# EAGLE board MidiMon_B (EAGLE 9.3.0)
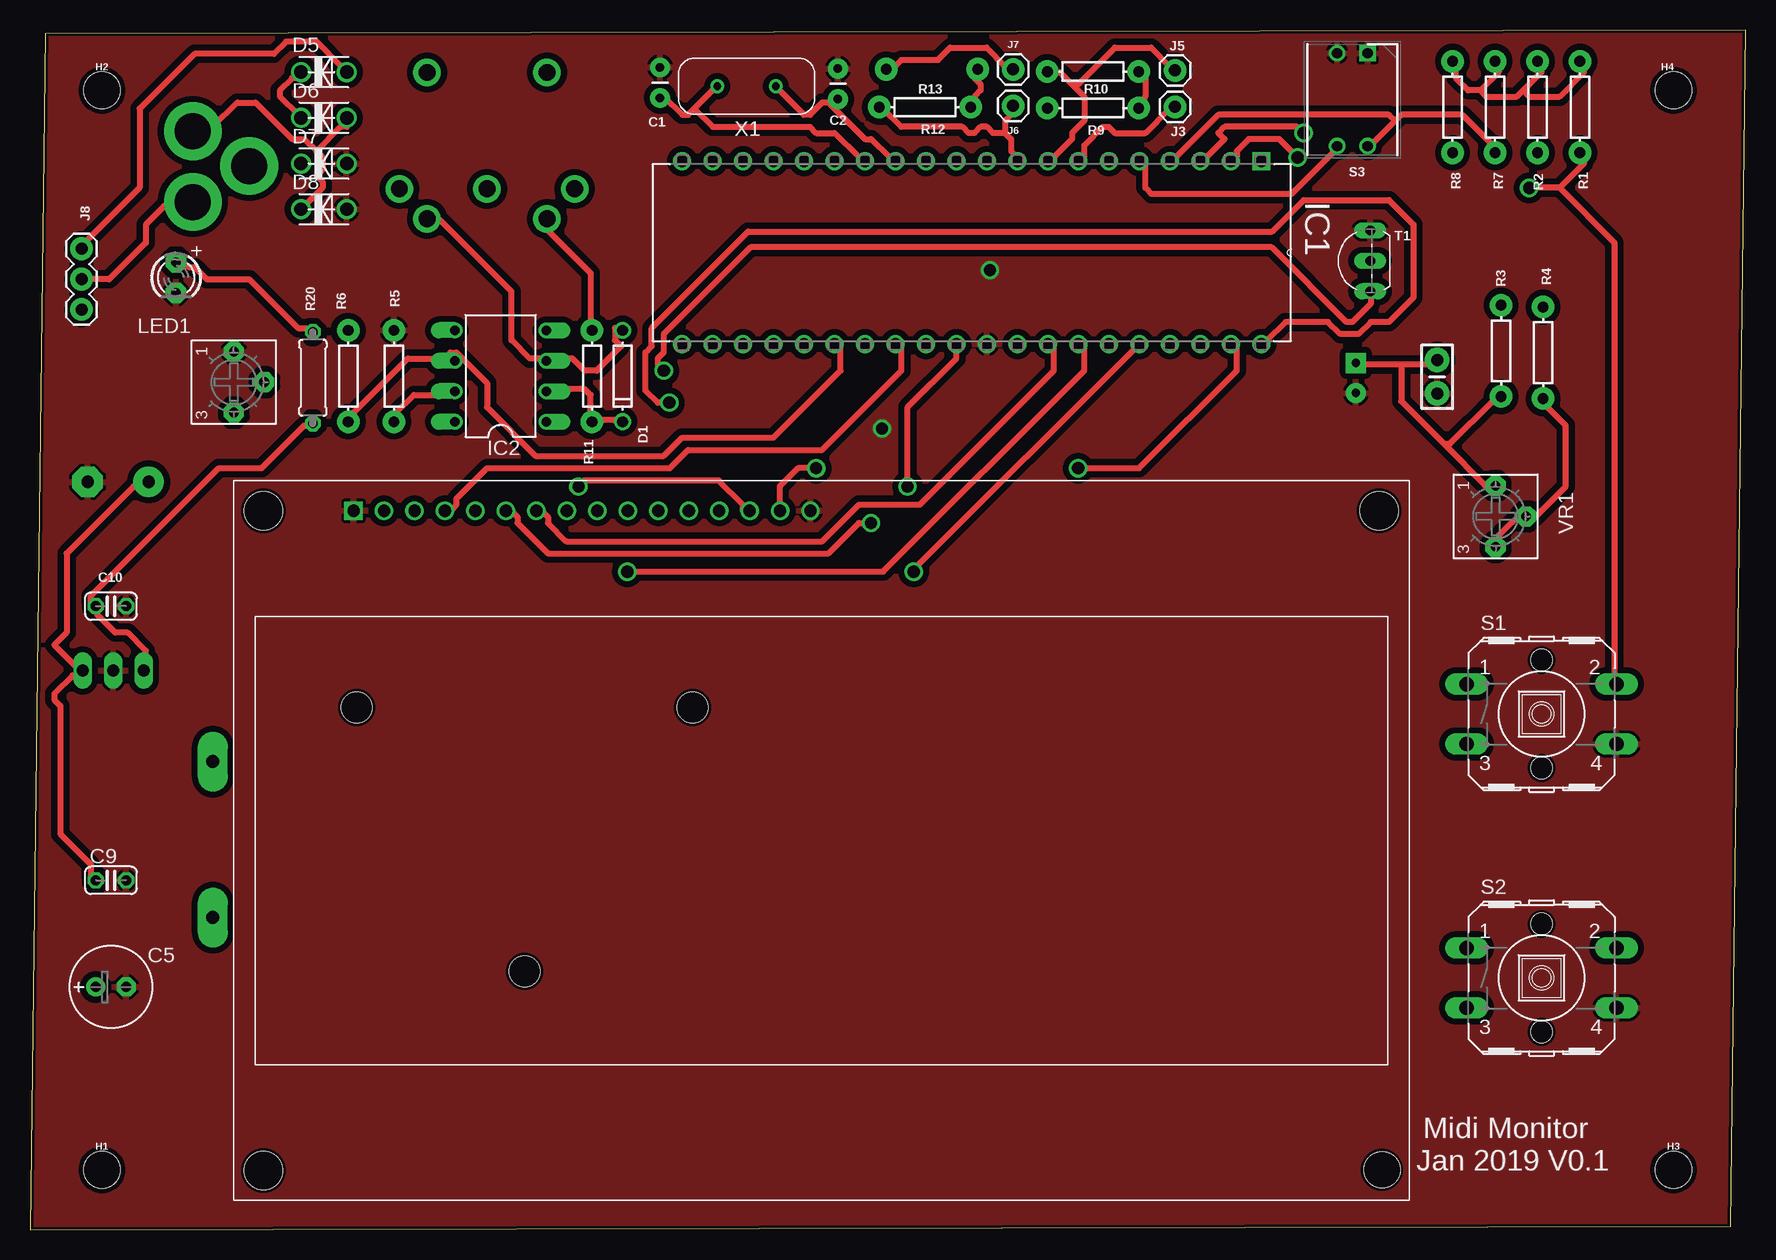
[diagram p0: board, top side]
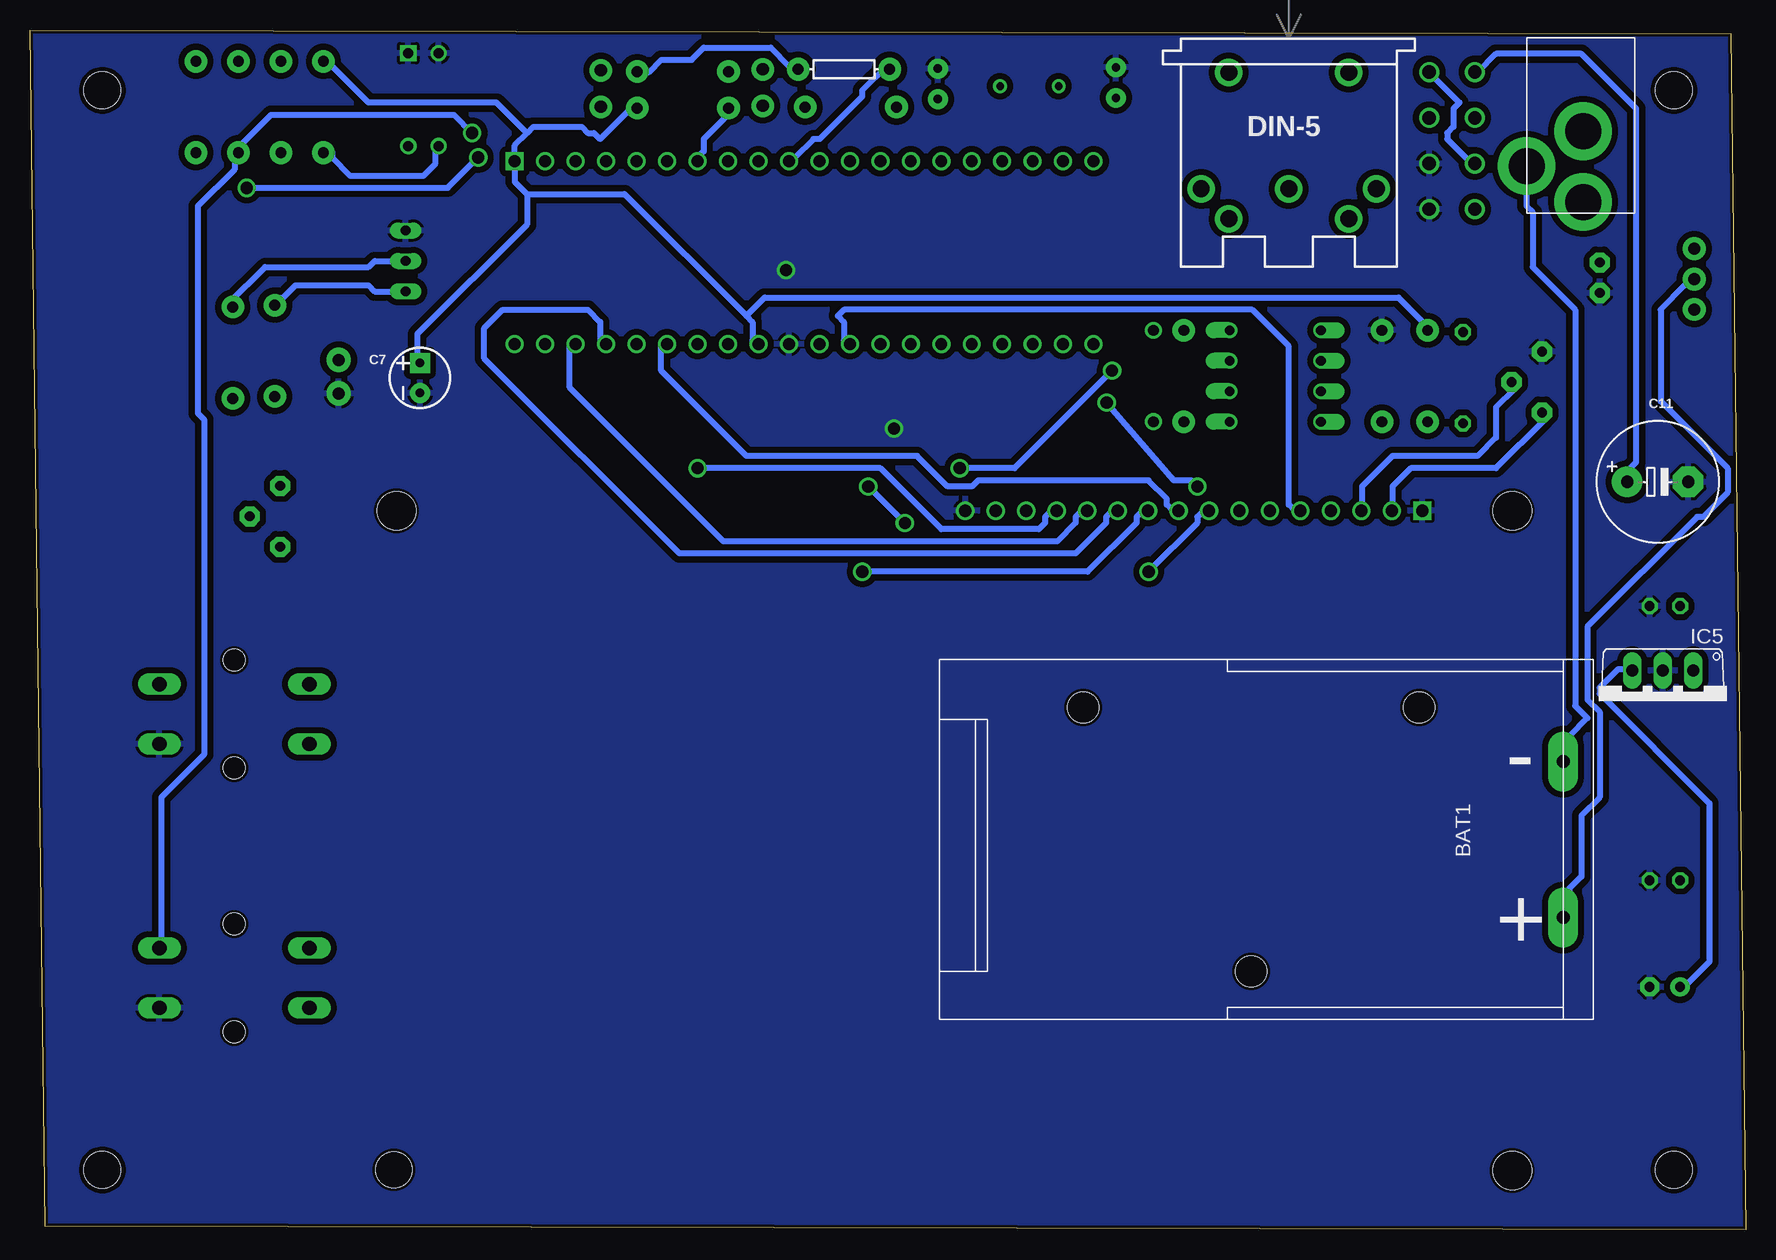
[diagram p1: board, bottom side, seen from below]

Size 143.03 x 100.03 mm. Coordinates in mm from the lower left corner, seen from the top.
Outline: 0,0 141.76,0.3 143.03,100.03 1.27,99.73 0,0
Copper layers (1*16): Top 0.035mm / dielectric 1.5mm / Bottom 0.035mm
Design rules "dirt_cheap_dirty_boards.v1.1": minimum track width 6mil, minimum drill 12mil, track to track 6mil, track to pad 6mil, pad to pad 6mil, via to via 6mil, smd to smd 0mil, copper to edge 10mil, drill to drill 10mil, minimum pad ring 10mil, minimum via ring 6mil, stop-mask expansion 2mil, vias tented up to drill 25mil, thermal gap 10mil
Net classes: 0 default: width 0.508 mm, drill 0.508 mm, clearance 0.508 mm
Holes 3 mm at 112.7,5

## Footprints (pad centres in the part's own frame; a part is rotated, then mirrored left to right if it is on the bottom)
PP3_BATTERBOX = drill 1.1 pad 2.5 long: 0V 52,21.5; 9V 52,8.5 | hole 2.6: 12,26; 40,26; 26,4
CAP-PTH-2.54 = drill 0.7 pad 1.651: 1 -1.27,0; 2 1.27,0
E2,5-7 = drill 0.813 pad 1.6: + -1.27,0 | drill 0.813 pad 1.6 octagon: - 1.27,0
CPOL-RADIAL-2.5MM-5MM = drill 0.7 pad 1.651 square: 1 1.25,0 | drill 0.7 pad 1.651: 2 -1.25,0
CAP-PTH-SMALL-KIT = drill 1.016 pad 2.032: 1 -1.397,0; 2 1.397,0
C025-024X044 = drill 0.813 octagon: 1 -1.27,0; 2 1.27,0
E5-10,5 = drill 1.016 pad 2.54: + -2.54,0 | drill 1.016 pad 2.54 octagon: - 2.54,0
DO-1N4148 = drill 0.9: A -3.81,0; C 3.81,0
DO-VERT = drill 1.118: A 2.54,0; C -1.27,0
STAND-OFF-TIGHT = hole 3.048: 0,0
DIP254P1524X533-40 = drill 0.991 square: 1 -15.24,48.26 | drill 0.991: 2 -15.24,45.72; 3 -15.24,43.18; 4 -15.24,40.64; 5 -15.24,38.1; 6 -15.24,35.56; 7 -15.24,33.02; 8 -15.24,30.48; 9 -15.24,27.94; 10 -15.24,25.4; 11 -15.24,22.86; 12 -15.24,20.32; 13 -15.24,17.78; 14 -15.24,15.24; 15 -15.24,12.7; 16 -15.24,10.16; 17 -15.24,7.62; 18 -15.24,5.08; 19 -15.24,2.54; 20 -15.24,0; 21 0,0; 22 0,2.54; 23 0,5.08; 24 0,7.62; 25 0,10.16; 26 0,12.7; 27 0,15.24; 28 0,17.78; 29 0,20.32; 30 0,22.86; 31 0,25.4; 32 0,27.94; 33 0,30.48; 34 0,33.02; 35 0,35.56; 36 0,38.1; 37 0,40.64; 38 0,43.18; 39 0,45.72; 40 0,48.26
DIL08 = drill 0.813 offset: 1 -3.81,-3.81; 2 -1.27,-3.81; 3 1.27,-3.81; 4 3.81,-3.81; 5 3.81,3.81; 6 1.27,3.81; 7 -1.27,3.81; 8 -3.81,3.81
TO220V = drill 1.016 long: 1 -2.54,-2.54; 2 0,-2.54; 3 2.54,-2.54
DIN5-RA-PTH = drill 1.4 pad 2.286: 1 7.3,12.5; 2 0,12.5; 3 -7.3,12.5; 4 5,15; 5 -5,15; 6 -5,2.8; 7 5,2.8
1X01 = drill 1.016 pad 1.88: 1 0,0
PJ-102A = drill 3 pad 4.8: RING 0.1,-3.39; RING_SW -4.6,-6.29; TIP 0.1,-9.29
1X03 = drill 1.016 pad 1.88: 1 0,0; 2 2.54,0; 3 5.08,0
LED3MM = drill 0.813 pad 1.676 octagon: A -1.27,0; K 1.27,0
AXIAL-0.3 = drill 0.9 pad 1.88: P$1 -3.81,0; P$2 3.81,0
0207/7 = drill 0.813 octagon: 1 -3.81,0; 2 3.81,0
B3F-40XX = drill 1.194 long: 1 -6.248,2.489; 2 6.248,2.489; 3 -6.248,-2.489; 4 6.248,-2.489 | hole 1.803: 0,-4.496; 0,4.496
DIPS774W56P254L726H790Q4N = drill 0.85 pad 1.275 square: 1 0,0 | drill 0.85 pad 1.275: 2 0,-2.54; 3 7.745,-2.54; 4 7.745,0
TO92-CBE = drill 0.813 long: B 0,0; C -2.54,0; E 2.54,0
LCD-20X4-3HOLES = drill 1.016 square: P$1 10,57.5 | drill 1.016: P$2 12.54,57.5; P$3 15.08,57.5; P$4 17.62,57.5; P$5 20.16,57.5; P$6 22.7,57.5; P$7 25.24,57.5; P$8 27.78,57.5; P$9 30.32,57.5; P$10 32.86,57.5; P$11 35.4,57.5; P$12 37.94,57.5; P$13 40.48,57.5; P$14 43.02,57.5; P$15 45.56,57.5; P$16 48.1,57.5 | hole 3.2: 2.5,2.5; 2.5,57.5; 95.5,57.5
BOURNS_3362P_TRIMMER = drill 0.813 pad 1.676 octagon: 1 -2.54,0; 2 0,2.54; 3 2.54,0
XTAL_ECS-100-18-4X = drill 0.63 pad 1.03: 1 -2.44,0; 2 2.44,0

## Placement (x,y rotation side)
BAT1  [PP3_BATTERBOX]  67.23,17.55 0 bottom
C1  18pF  [CAP-PTH-2.54]  52.51,95.64 270 top
C2  18pF  [CAP-PTH-2.54]  67.35,95.54 270 top
C5  10uf  [E2,5-7]  6.75,20.25 0 top
C7  10uF  [CPOL-RADIAL-2.5MM-5MM]  110.52,71.02 90 bottom
C8  0.1uF  [CAP-PTH-SMALL-KIT]  117.3,71.12 90 top
C9  330nf  [C025-024X044]  6.75,29.14 0 top
C10  100nf  [C025-024X044]  6.75,52 0 top
C11  2200uf  [E5-10,5]  7.35,62.36 0 bottom
D1  [DO-1N4148]  49.39,71.18 270 top
D5  1N4004  [DO-VERT]  23.86,96.52 0 top
D6  1N4004  [DO-VERT]  23.86,92.71 0 top
D7  1N4004  [DO-VERT]  23.86,88.9 0 top
D8  1N4004  [DO-VERT]  23.86,85.09 0 top
H1  STAND-OFFTIGHT  [STAND-OFF-TIGHT]  6,5 0 top
H2  STAND-OFFTIGHT  [STAND-OFF-TIGHT]  6,95 0 top
H3  STAND-OFFTIGHT  [STAND-OFF-TIGHT]  137,5 0 top
H4  STAND-OFFTIGHT  [STAND-OFF-TIGHT]  137,95 0 top
IC1  PIC18F4520-I/P  [DIP254P1524X533-40]  54.37,73.85 270 top
IC2  6N138  [DIL08]  39.23,71.18 90 top
IC5  7805TV  [TO220V]  6.93,44.09 180 bottom
J1  DIN5  [DIN5-RA-PTH]  38.1,99.29 180 bottom
J3  [1X01]  95.45,93.63 0 top
J4  2.1MMJACKTHM  [PJ-102A]  13.67,94.98 0 bottom
J5  [1X01]  95.45,96.67 0 top
J6  [1X01]  81.95,93.71 0 top
J7  [1X01]  81.95,96.75 0 top
J8  [1X03]  4.3,81.8 270 top
LED1  [LED3MM]  12.17,79.38 270 top
R1  10k  [AXIAL-0.3]  129.2,93.61 270 top
R2  10k  [AXIAL-0.3]  125.66,93.61 270 top
R3  10k  [AXIAL-0.3]  122.63,73.28 270 top
R4  10k  [AXIAL-0.3]  126.13,73.12 270 top
R5  5.6k  [AXIAL-0.3]  30.34,71.18 270 top
R6  1.2k  [AXIAL-0.3]  26.53,71.18 90 top
R7  10k  [AXIAL-0.3]  122.12,93.61 270 top
R8  10k  [AXIAL-0.3]  118.58,93.61 270 top
R9  10k  [AXIAL-0.3]  88.61,93.52 180 top
R10  10k  [AXIAL-0.3]  88.61,96.56 0 top
R11  220  [AXIAL-0.3]  46.85,71.18 90 top
R12  10k  [AXIAL-0.3]  74.61,93.6 0 top
R13  10k  [AXIAL-0.3]  75.19,96.76 180 bottom
R20  1k  [0207/7]  23.58,71.04 90 top
S1  [B3F-40XX]  126,43 0 top
S2  [B3F-40XX]  126,21 0 top
S3  195-2MST  [DIPS774W56P254L726H790Q4N]  111.5,98.1 270 top
T1  [TO92-CBE]  111.72,80.78 90 top
U$2  LCD-HD4478020X4-3HOLES  [LCD-20X4-3HOLES]  16.97,2.45 0 top
VR1  [BOURNS_3362P_TRIMMER]  122.17,59.48 270 top
VR2  [BOURNS_3362P_TRIMMER]  16.99,70.67 270 top
X1  ECS-100-18-4X  [XTAL_ECS-100-18-4X]  59.73,95.34 180 top

## Library data of the parts
BAT1 D5-D8 = jasons_stuff
C1 C2 = SparkFun-Capacitors; PROD_ID: CAP-09128
C5 C9 C10 R20 = rcl
C7 = SparkFun-Capacitors; PROD_ID: CAP-08440
C8 = SparkFun-Capacitors; PROD_ID: CAP-08370
C11 D1 J4 LED1 = adafruit
H1-H4 = SparkFun-Hardware
IC1 = PIC18F4520-I_P; AVAILABILITY: Unavailable; DESCRIPTION: PIC18 Series 1.5 kB RAM 32 kB Flash 36 I/O 8-Bit Microcontroller - PDIP-40; MF: Microchip; MP: PIC18F4520-I/P; PACKAGE: TQFP-44 Microchip; PRICE: None
IC2 = optocoupler; MF: VISHAY/TELEFUNKEN; MPN: 6N138; OC_FARNELL: 9860150; OC_NEWARK: 35K5294
IC5 = linear
J1 = SparkFun-Connectors; PROD_ID: CONN-09481
J3 J5-J8 = SparkFun-Connectors
R1-R13 = SparkFun-Resistors; PROD_ID: RES-08380
S1 S2 = adafruit; MF: OMRON COMPONENTS USA; MPN: B3F-4000; OC_FARNELL: 176434; OC_NEWARK: 36K3105
S3 = SamacSys_Parts; DESCRIPTION: Switch DIP OFF ON SPST 2 Piano 0.05A 24VDC PC Pins 2.54mm Thru-Hole Tube; HEIGHT: 7.9mm; MANUFACTURER_NAME: CTS; MANUFACTURER_PART_NUMBER: 195-2MST; MOUSER_PART_NUMBER: 774-1952MST
T1 = DC_LOAD_AU
U$2 = HD44780LCD
VR1 VR2 = MusicThingModular
X1 = ECS-100-18-4X; DESCRIPTION: Crystal 10MHz ±30ppm _Tol_ ±50ppm _Stability_ 18pF FUND 60Ohm 2-Pin HC-49/USX Thru-Hole; DIGI-KEY_PART_NUMBER: X1080-ND; DIGI-KEY_PURCHASE_URL: https://www.digikey.ca/product-detail/en/ecs-inc/ECS-100-18-4X/X1080-ND/827571?utm_source=snapeda&utm_medium=aggregator&utm_campaign=symbol; MF: ECS Inc.; MP: ECS-100-18-4X; PACKAGE: HC49/US ECS International

## Nets
5V: C7.1 C8.2 IC1.1 IC1.32 R1.P$1 R2.P$1 R3.P$2 R6.P$2 R7.P$1 R8.P$1 R9.P$1 R10.P$2 R12.P$2 R13.P$2 VR1.1
A: R3.P$1 T1.C U$2.P$15
D0: IC1.33 U$2.P$7
D1: IC1.34 U$2.P$8
D2: IC1.35 U$2.P$9
D3: IC1.36 U$2.P$10
D4: IC1.37 U$2.P$11
D5: IC1.38 U$2.P$12
D6: IC1.39 U$2.P$13
D7: IC1.40 U$2.P$14
E: IC1.30 U$2.P$6
GND: C1.1 C2.1 C5.- C7.2 C8.1 C9.2 C10.2 C11.- D7.A D8.A IC1.31 IC5.2 LED1.K R5.P$1 S1.4 S2.4 S3.1 S3.2 T1.E U$2.P$1 U$2.P$16 VR2.1
MIDI: IC1.26 IC2.6 R6.P$1
N$1: BAT1.0V J4.RING_SW
N$2: R4.P$2 VR1.2 VR1.3
N$3: IC2.7 R5.P$2
N$4: D1.C IC2.2 R11.P$1
N$5: J1.4 R11.P$2
N$6: D1.A IC2.3 J1.5
N$7: C1.2 IC1.14 X1.2
N$9: C2.2 IC1.13 X1.1
N$10: D5.A D7.C J8.1
N$13: IC1.4 R7.P$2 S3.4
N$14: IC1.2 R1.P$2 S1.2
N$15: IC1.3 R2.P$2 S2.2
N$17: IC1.5 R8.P$2 S3.3
N$18: U$2.P$2 VR2.3
N$19: LED1.A R20.2
N$20: IC1.7 J3.1 R9.P$2
N$22: D6.A D8.C J4.RING
N$23: C5.+ C10.1 IC5.3 R20.1
N$24: U$2.P$3 VR2.2
N$28: R4.P$1 T1.B
N$29: IC1.9 J6.1 R12.P$1
N$30: IC1.8 J5.1 R10.P$1
N$31: IC1.10 J7.1 R13.P$1
PWR+1: BAT1.9V J4.TIP J8.2
RS: IC1.28 U$2.P$4
RW: IC1.29 U$2.P$5
VDD_2: IC1.11
VIN: C9.1 C11.+ D5.C D6.C IC5.1
VSS_2: IC1.12

## Tracks (layer width: path | path; a pad name or v marks a point on that pad's centre or on a via)
5V
  Top 0.508: 114.3,72.14 116.84,72.14 C8.2 | 114.3,72.14 110.74,72.14 C7.1 | 117.86,65.53 114.3,69.09 114.3,72.14 | 117.86,65.53 121.41,61.98 121.92,61.98 VR1.1 | 117.86,65.53 118.36,65.53 121.92,69.09 122.43,69.09 R3.P$2 | 120.9,95 119.89,95 118.87,96.01 118.87,97.03 R8.P$1 | 120.9,95 122.43,96.52 122.43,97.03 R7.P$1 | 124.46,95 123.95,94.49 121.41,94.49 120.9,95 | 124.46,95 125.98,96.52 125.98,97.03 R2.P$1 | 124.46,95 124.97,94.49 127.51,94.49 129.54,96.52 129.54,97.03 R1.P$1 | R12.P$2 78.74,93.98 78.74,94.49 79.25,95 79.25,95.5 78.74,96.01 78.74,96.52 R13.P$2 | R9.P$1 92.46,93.98 92.96,94.49 92.96,96.01 92.46,96.52 R10.P$2
  Bottom 0.508: 83.31,76.2 93.47,86.36 101.6,86.36 | 83.31,76.2 82.8,75.69 82.8,74.17 IC1.32 | 101.6,86.36 102.62,87.38 102.62,88.9 IC1.1 102.62,89.41 102.62,90.42 101.6,91.44 | 83.31,76.2 81.79,77.72 28.96,77.72 26.92,75.69 26.92,75.18 R6.P$2 | 101.6,91.44 101.09,91.95 97.03,91.95 96.52,91.44 96.01,91.44 95.5,90.93 92.96,93.47 92.46,93.47 R9.P$1 | R13.P$2 79.25,97.03 79.76,97.03 81.28,98.55 86.87,98.55 87.88,97.54 90.42,97.54 91.44,96.52 91.95,96.52 R10.P$2 | 101.6,91.44 104.14,93.98 114.81,93.98 117.86,97.03 118.36,97.03 R8.P$1 | 101.6,86.36 101.6,83.82 110.74,74.68 110.74,72.64 C7.1
A  (via drill 1.02)
  Top 0.508: v65.53,63.5 64.01,63.5 62.48,61.98 62.48,60.45 U$2.P$15 | v52.83,71.63 52.32,72.14 52.32,72.64 52.83,73.15 52.83,74.68 60.06,81.91 103.51,81.91 109.73,75.69 110.24,75.69 111.76,77.22 111.76,78.23 T1.C
  Bottom 0.508: T1.C 111.76,78.23 114.3,78.23 114.81,78.74 120.9,78.74 121.92,77.72 122.43,77.72 122.94,77.22 R3.P$1 | v65.53,63.5 60.96,63.5 v52.83,71.63
D0
  Top 0.508: IC1.33 85.34,73.66 85.34,71.63 74.17,60.45 69.09,60.45 66.04,57.4 44.7,57.4 43.18,58.93 43.18,59.44 42.67,59.94 U$2.P$7
D1  (via drill 1.02)
  Top 0.508: v49.78,54.86 71.12,54.86 87.88,71.63 87.88,73.66 IC1.34
  Bottom 0.508: v49.78,54.86 45.72,58.93 45.72,59.44 45.21,59.94 U$2.P$8
D2
  Bottom 0.508: IC1.35 90.42,73.66 90.42,71.63 83.31,64.52 69.09,64.52 66.55,61.98 64.52,61.98 64.01,62.48 49.78,62.48 48.26,60.96 48.26,60.45 47.75,59.94 U$2.P$9
D3  (via drill 1.02)
  Top 0.508: IC1.36 73.57,54.95 v73.66,54.86
  Bottom 0.508: v73.66,54.86 54.86,54.86 50.8,58.93 50.8,59.44 50.29,59.94 U$2.P$10
D4
  Bottom 0.508: IC1.37 95.5,74.17 95.5,75.69 96.52,76.71 103.63,76.71 105.16,75.18 105.16,72.64 88.9,56.39 55.88,56.39 53.34,58.93 53.34,59.44 52.83,59.94 U$2.P$11
D5
  Bottom 0.508: IC1.38 98.04,73.66 98.04,70.23 85.22,57.4 57.4,57.4 55.88,58.93 55.88,59.44 55.37,59.94 U$2.P$12
D6  (via drill 1.02)
  Top 0.508: v87.38,63.5 92.46,63.5 100.58,71.63 100.58,73.66 IC1.39
  Bottom 0.508: v87.38,63.5 72.14,63.5 67.06,58.42 58.93,58.42 58.42,58.93 58.42,59.44 57.91,59.94 U$2.P$13
D7  (via drill 1.02)
  Top 0.508: v53.28,68.96 52.34,68.96 51.31,69.99 51.31,73.15 51.82,73.66 51.82,75.18 59.86,83.22 103.54,83.22 106.17,85.85 113.28,85.85 115.32,83.82 115.32,77.72 113.28,75.69 111.76,75.69 110.74,74.68 109.22,74.68 108.2,75.69 104.65,75.69 103.12,74.17 IC1.40 | v45.72,61.98 46.23,62.48 57.4,62.48 59.44,60.45 59.44,59.94 59.94,59.94 U$2.P$14
  Bottom 0.508: v53.28,68.96 47.68,62.48 46.23,62.48 v45.72,61.98
E  (via drill 1.02)
  Top 0.508: v73.15,61.98 73.15,68.58 77.22,72.64 77.22,73.66 IC1.30 | v70.1,58.93 69.09,58.93 66.55,56.39 43.18,56.39 40.64,58.93 40.64,59.44 40.13,59.94 U$2.P$6
  Bottom 0.508: v70.1,58.93 v73.15,61.98
GND  (via drill 1)
  other vias: 80,80 71,66.8
  pour Top: -9,108 171,108 171,-6 -9,-6
  pour Bottom: -9,108 171,108 171,-6 -9,-6
MIDI
  Top 0.508: 34.54,72.64 31.5,72.64 26.92,68.07 26.42,68.07 25.91,67.56 26.42,67.06 R6.P$1 | 34.54,72.64 35.05,72.64 IC2.6 34.54,72.64 | 34.54,72.64 35.05,73.15 35.56,73.15 38.1,70.61 38.1,68.58 42.16,64.52 52.83,64.52 54.36,66.04 61.98,66.04 67.56,71.63 67.56,73.66 IC1.26
N$1
  Bottom 0.508: BAT1.0V 14.73,39.12 14.73,41.15 13.21,42.67 14.22,43.69 14.22,76.71 17.78,80.26 17.78,84.84 18.29,85.34 18.29,88.39 J4.RING_SW
N$2
  Top 0.508: VR1.3 122.43,57.4 122.43,57.91 124.46,59.94 VR1.2 124.46,59.44 124.97,58.93 128.02,61.98 128.02,67.06 126.49,68.58 126.49,69.09 R4.P$2
N$3
  Top 0.508: IC2.7 35.05,69.6 32,69.6 30.48,68.07 30.99,67.56 30.48,67.06 R5.P$2
N$4
  Top 0.508: IC2.2 43.18,70.1 46.23,70.1 46.74,69.6 46.74,68.07 46.23,67.56 46.74,67.06 R11.P$1 47.24,67.56 49.28,67.56 D1.C
N$5
  Top 0.508: R11.P$2 46.74,75.18 46.74,79.76 43.18,83.31 43.69,83.82 43.18,84.33 J1.4
N$6
  Top 0.508: D1.A 49.28,75.18 48.77,75.18 48.77,74.17 49.28,73.66 47.24,71.63 46.23,71.63 45.21,72.64 43.18,72.64 IC2.3 42.67,72.64 41.66,72.64 40.13,74.17 40.13,78.23 34.04,84.33 33.53,84.33 J1.5
N$7
  Top 0.508: 55.37,93.47 54.86,92.96 54.36,92.96 52.83,94.49 C1.2 | 55.37,93.47 56.9,95 X1.2 | 55.37,93.47 56.9,91.95 65.02,91.95 65.53,91.44 67.06,91.44 69.09,89.41 69.6,89.41 IC1.14
N$9
  Top 0.508: 66.55,93.98 67.06,93.98 C2.2 66.55,93.98 | 66.55,93.98 66.04,93.98 65.02,92.96 64.52,92.96 62.48,95 X1.1 | 66.55,93.98 69.6,90.93 70.1,90.93 71.63,89.41 72.14,89.41 IC1.13
N$10
  Top 0.508: J8.1 4.57,82.3 9.14,86.87 9.14,93.47 13.72,98.04 20.32,98.04 21.34,99.06 23.88,99.06 25.91,97.03 26.42,97.03 26.42,96.52 D5.A
  Bottom 0.508: D7.C 22.86,88.9 24.89,90.93 24.89,91.44 24.38,91.95 24.38,93.47 23.88,93.98 25.91,96.01 26.42,96.01 26.42,96.52 D5.A
N$13
  Top 0.508: 113.79,92.46 114.3,92.96 119.38,92.96 122.43,89.92 R7.P$2 | 113.79,92.46 111.76,90.42 S3.4 | 113.79,92.46 113.28,92.96 99.06,92.96 95.5,89.41 IC1.4
N$14  (via drill 1.02)
  Top 0.508: v105.66,89.41 104.14,90.93 101.6,90.93 100.58,89.92 100.58,89.41 IC1.2 | 127.51,86.87 v124.97,86.87 | 127.51,86.87 129.54,88.9 129.54,89.41 R1.P$2 | 127.51,86.87 132.08,82.3 132.08,45.72 S1.2
  Bottom 0.508: v105.66,89.41 108.2,86.87 v124.97,86.87
N$15  (via drill 1.02)
  Top 0.508: v106.17,91.44 105.66,91.95 99.57,91.95 99.06,91.44 99.57,90.93 98.04,89.41 IC1.3
  Bottom 0.508: v106.17,91.44 107.7,92.96 122.94,92.96 125.98,89.92 R2.P$2 125.98,89.41 125.98,88.39 129.03,85.34 129.03,68.07 128.52,67.56 128.52,39.62 132.08,36.07 132.08,23.88 S2.2
N$17
  Top 0.508: IC1.5 92.96,88.9 92.96,86.87 93.47,86.36 105.16,86.36 108.71,89.92 S3.3
  Bottom 0.508: S3.3 109.22,89.92 109.22,88.9 110.24,87.88 116.33,87.88 117.86,89.41 117.86,89.92 118.36,90.42 118.87,89.92 R8.P$2
N$18
  Bottom 0.508: U$2.P$2 29.46,60.45 29.46,61.98 27.94,63.5 20.83,63.5 16.76,67.56 16.76,68.07 VR2.3
N$19
  Top 0.508: R20.2 23.37,75.18 22.35,75.18 18.29,79.25 14.73,79.25 13.72,80.26 13.21,80.26 12.7,80.77 12.19,80.77 LED1.A
N$20
  Top 0.508: J3.1 95,93.47 92.96,91.44 90.42,91.44 89.92,91.95 89.41,91.95 87.88,90.42 87.88,89.41 IC1.7
  Bottom 0.508: IC1.7 87.38,89.41 86.87,89.92 86.87,90.93 84.33,93.47 R9.P$2
N$22
  Top 0.508: 23.88,89.92 24.38,89.41 24.38,88.39 23.88,87.88 24.38,87.38 24.38,86.87 22.86,85.34 D8.C | 23.88,89.92 25.91,91.95 26.42,91.95 26.92,92.46 26.42,92.96 D6.A | 23.88,89.92 22.86,90.93 21.84,90.93 18.8,93.98 17.27,93.98 15.24,91.95 13.72,91.95 J4.RING
N$23
  Top 0.508: IC5.3 9.65,46.74 9.65,48.26 8.13,49.78 7.11,49.78 5.59,51.31 5.59,51.82 C10.1 5.08,52.32 5.08,52.83 15.75,63.5 19.3,63.5 22.86,67.06 23.37,67.06 R20.1
  Bottom 0.508: C5.+ 5.08,20.32 3.05,22.35 3.05,35.56 12.19,44.7 12.19,45.21 10.67,46.74 9.65,46.74 IC5.3
N$24
  Bottom 0.508: U$2.P$3 32,60.45 32,61.98 29.46,64.52 22.35,64.52 20.83,66.04 20.83,68.58 19.3,70.1 19.3,70.61 VR2.2
N$28
  Bottom 0.508: T1.B 111.76,80.77 114.3,80.77 114.81,80.26 123.44,80.26 126.49,77.22 R4.P$1
N$29
  Top 0.508: 81.28,91.44 81.79,90.93 81.79,89.92 82.3,89.41 IC1.9 | 81.28,91.44 81.28,92.46 82.3,93.47 J6.1 | 81.28,91.44 80.26,91.44 79.76,91.95 79.25,91.95 78.74,91.44 78.23,91.44 77.72,91.95 72.64,91.95 71.12,93.47 R12.P$1
N$30
  Top 0.508: 86.87,95.5 85.85,96.52 84.84,96.52 R10.P$1 | 86.87,95.5 87.88,94.49 87.88,92.46 86.87,91.44 86.87,90.93 85.34,89.41 IC1.8 | 86.87,95.5 87.38,95.5 90.42,98.55 93.47,98.55 95,97.03 J5.1
N$31
  Top 0.508: J7.1 81.79,97.03 81.28,97.03 79.76,98.55 76.71,98.55 75.69,97.54 72.64,97.54 71.63,96.52 R13.P$1
  Bottom 0.508: IC1.10 79.76,89.41 79.25,89.41 77.72,90.93 77.22,90.93 73.66,94.49 73.66,95 71.63,97.03 R13.P$1
PWR+1
  Top 0.508: J8.2 4.57,79.25 6.6,79.25 9.65,82.3 9.65,83.82 11.18,85.34 13.21,85.34 J4.TIP
  Bottom 0.508: BAT1.9V 14.73,26.42 14.73,28.45 13.72,29.46 13.72,34.54 12.19,36.07 12.19,43.18 13.21,44.2 13.21,50.29 4.06,59.44 3.56,59.44 1.52,61.47 1.52,63.5 7.11,69.09 7.11,76.71 5.08,78.74 4.57,78.74 4.06,79.25 J8.2
RS
  Top 0.508: IC1.28 72.64,73.66 72.64,71.63 66.04,65.02 54.86,65.02 53.34,63.5 38.1,63.5 35.56,60.96 35.56,60.45 35.05,59.94 U$2.P$4
RW
  Bottom 0.508: IC1.29 75.18,74.17 75.18,75.69 75.69,76.2 75.18,76.71 41.15,76.71 38.1,73.66 38.1,60.45 37.59,59.94 U$2.P$5
VIN
  Top 0.508: C9.1 5.08,29.46 5.08,30.48 2.54,33.02 2.54,43.69 2.03,44.2 2.03,44.7 3.56,46.23 4.06,45.72 4.57,46.23 IC5.1 4.06,46.74 2.03,48.77 3.05,49.78 3.05,56.39 8.64,61.98 9.65,61.98 C11.+ | D6.C 22.35,92.96 20.83,94.49 20.83,95 21.84,96.01 22.35,96.01 22.86,96.52 D5.C
  Bottom 0.508: D5.C 22.35,96.52 20.83,98.04 13.72,98.04 9.14,93.47 9.14,64.01 9.65,63.5 9.65,62.48 C11.+

## Text on the board
tPlace: Midi Monitor | Jan 2019 V0.1